# Altium PCB TrebleBoost.PcbDoc
Units mil, origin at the board's own origin, x right, y up, seen from the top; angles counter-clockwise.
Board outline 2400 x 1800 mil, 2 copper layers (Top Layer, Bottom Layer); 45 components, 38 nets, 161 pads, 0 vias.
Unrouted connection lines stored in the file: 58.
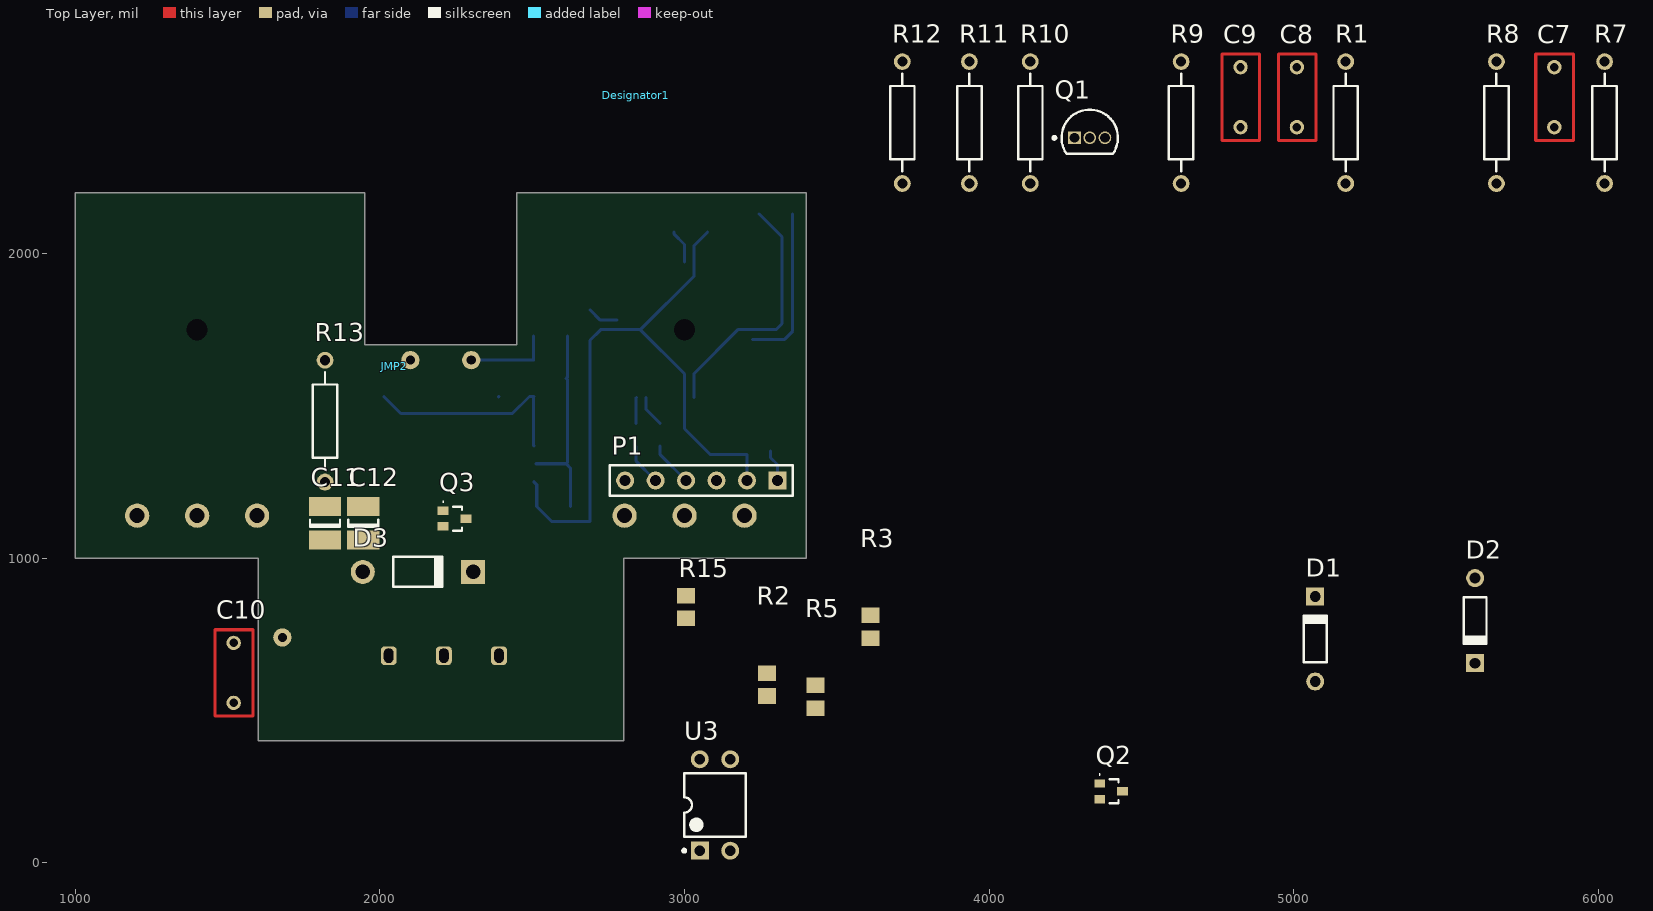
[diagram p0: Top Layer view]
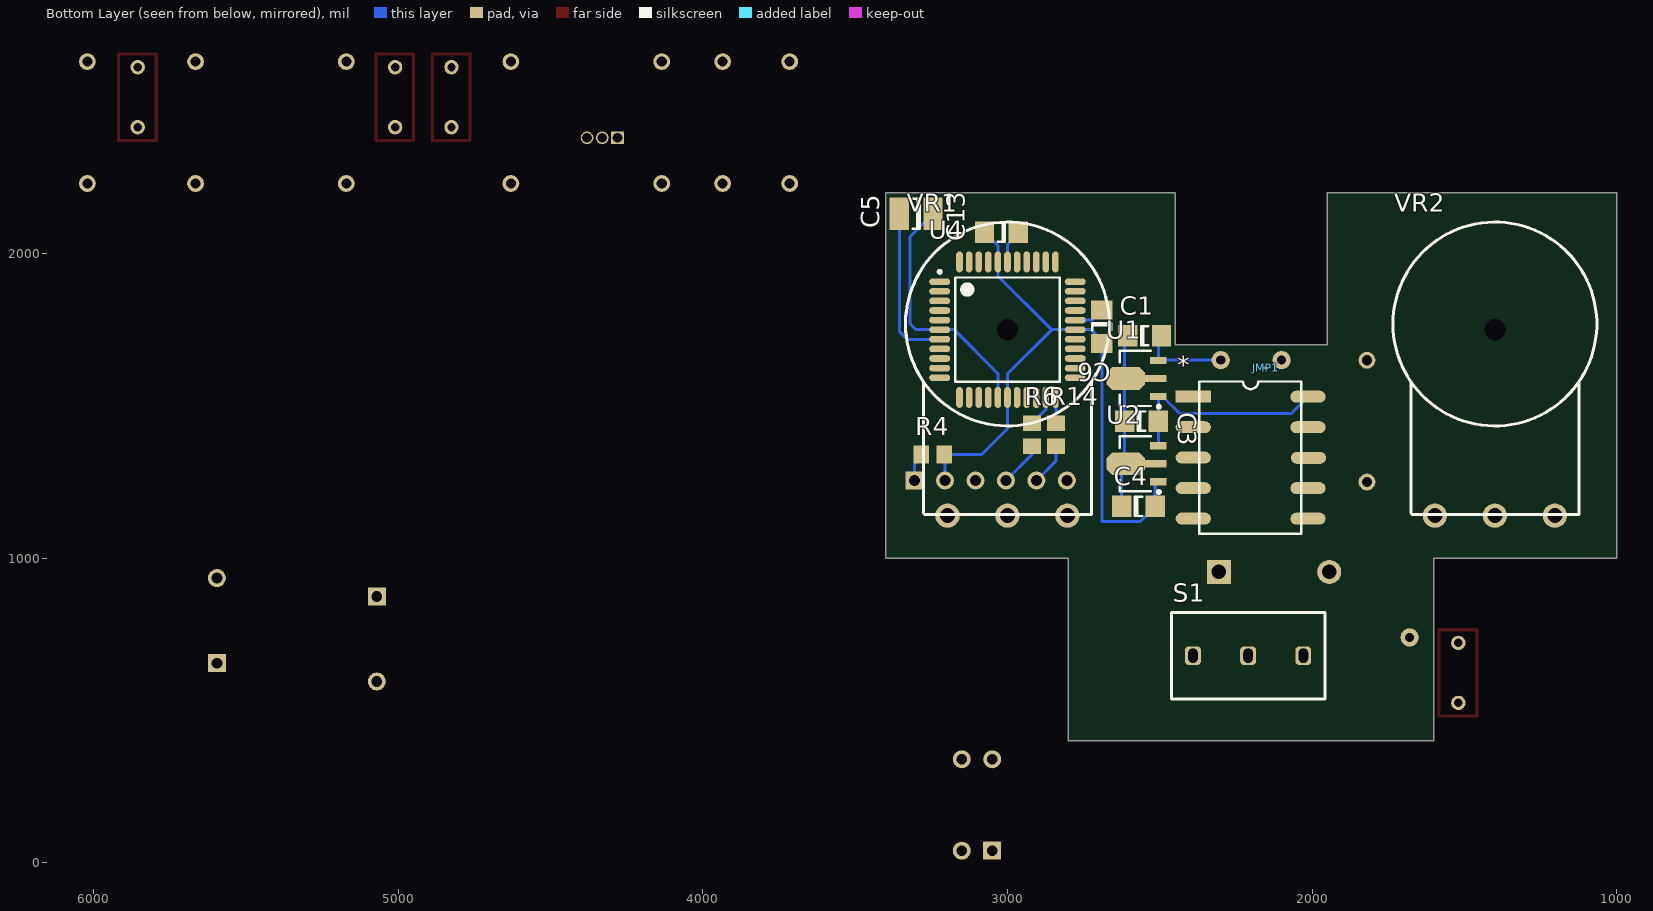
[diagram p1: Bottom Layer view, seen from below]

## Layer stack, top to bottom
Top Solder: solder mask 0.4, Solder Resist, Dk 3.5
Top Layer: signal copper 1.4
Dielectric 1: dielectric 12.6, FR-4, Dk 4.8
Bottom Layer: signal copper 1.4
Bottom Solder: solder mask 0.4, Solder Resist, Dk 3.5

## Board outline
1950,2200 1950,1700 2450,1700 2450,2200 3400,2200 3400,1000 2800,1000 2800,400 1600,400 1600,1000 1000,1000 1000,2200

## Design rules (kind name [scope] priority, off if disabled: settings)
Clearance [All] p1: gap=7 ignorepadtopadclearanceinfootprint=FALSE except(0: Arc-Hole Track-Hole)
ComponentClearance [All] p1: gap=5 collisioncheckmode=3 verticalgap=10 showdistances=FALSE
PolygonConnect [All] p1: connectstyle=Relief reliefconductorwidth=10 reliefentries=4 polygonreliefangle="90 Angle" airgapwidth=10
RoomDefinition U_TrebleBoost [InComponentClass('U_TrebleBoost')] p1 off: confinementstyle=ConfineIn formatcopy=TRUE lockcomponents=FALSE outline 3445,2140 6105,2140 6105,2770 3445,2770
RoomDefinition U_RelayBypass [InComponentClass('U_RelayBypass')] p2 off: confinementstyle=ConfineIn formatcopy=TRUE lockcomponents=FALSE outline 3445,1440 6820,1440 6820,2090 3445,2090
RoomDefinition U_Connectors [InComponentClass('U_Connectors')] p3 off: confinementstyle=ConfineIn formatcopy=TRUE lockcomponents=FALSE outline 3445,1060 4485,1060 4485,1350 3445,1350
RoutingVias [All] p1: holewidth=28 width=50 viastyle="Through Hole" minholewidth=28 minwidth=50 maxholewidth=28 maxwidth=50
SolderMaskExpansion [All] p1: expansion=4
Width [All] p1: maxlimit=10 minlimit=10 preferedwidth=10
29 further rules are at their usual default settings.

## Classes and differential pairs
component class U_Connectors: C1 C3 C4 C11 C12 D3 JMP1 JMP2 R13 U1 U2
component class U_RelayBypass: * C5 C6 C13 D1 D2 P1 Q2 Q3 R2 R3 R4 R5 R6 R14 R15 U3 U4
component class U_TrebleBoost: C7 C8 C9 C10 Q1 R1 R7 R8 R9 R10 R11 R12 S1 VR1 VR2

## Components (designator, comment, footprint, x,y, rotation, side; value= is the part's Value field where it differs from the comment)
* "Relay DPDT Dual Coil" "EB2 Relay" 2390,1530 r180 bottom
C1 "C1206" 1206 2550,1730 r180 bottom value=100pF
C3 "C1206" 1206 2560,1450 r180 bottom value=100pF
C4 "C1206" 1206 2570,1170 r180 bottom value=100pF
C5 "C1210" 1210 3300,2130 r0 bottom value=100pF
C6 "C1206" 1206 2690,1760 r270 bottom value=100pF
C7 "Wima Capacitor" "Cap-0.2\"" 5855,2415 r90 top value=100n
C8 "Wima Capacitor" "Cap-0.2\"" 5010,2415 r90 top value=100n
C9 "Wima Capacitor" "Cap-0.2\"" 4825,2415 r90 top value=100n
C10 "Wima Capacitor" "Cap-0.2\"" 1520,525 r90 top value=100n
C11 "C1210" 1210 1820,1115 r90 top value=100pF
C12 "C1210" 1210 1945,1115 r90 top value=100pF
C13 "C1206" 1206 3020,2070 r0 bottom value=100pF
D1 "Diode 1N4148" DO-35 5070,735 r90 top
D2 "Diode 1N4148" DO-35 5595,795 r270 top
D3 "BZX85C12" DO41 2125,955 r0 top
Designator1 "Comment" DC_Jack 2840,2520 r90 top
JMP1 "Jumper" Jumper 2150,1625 r0 bottom
JMP2 "Jumper" Jumper 2045,1630 r0 top
P1 "Header 6" HDR1X6 3305,1255 r180 top
Q1 "2N5088G" ONSC-TO-92-3-29-11 4330,2380 r0 top
Q2 "MMBT3904WT1G" ONSC-SC-70-3-419-04_V 4400,235 r0 top
Q3 "MMBT3904WT1G" ONSC-SC-70-3-419-04_V 2245,1130 r0 top
R1 "Res2" AXIAL-0.4 5170,2430 r90 top value=1K
R2 "ERJ6BQ" 6-0805 3270,585 r90 top
R3 "ERJ6BQ" 6-0805 3610,775 r90 top
R4 "ERJ6BQ" 6-0805 3245,1340 r180 bottom
R5 "ERJ6BQ" 6-0805 3430,545 r90 top
R6 "ERJ6BQ" 6-0805 2920,1405 r90 bottom
R7 "Res2" AXIAL-0.4 6020,2430 r90 top value=1K
R8 "Res2" AXIAL-0.4 5665,2430 r90 top value=1K
R9 "Res2" AXIAL-0.4 4630,2430 r90 top value=1K
R10 "Res2" AXIAL-0.4 4135,2430 r90 top value=1K
R11 "Res2" AXIAL-0.4 3935,2430 r90 top value=1K
R12 "Res2" AXIAL-0.4 3715,2430 r90 top value=1K
R13 "Res2" AXIAL-0.4 1820,1450 r270 top value=1K
R14 "ERJ6BQ" 6-0805 2840,1405 r90 bottom
R15 "ERJ6BQ" 6-0805 3005,840 r270 top
S1 "SPDT Toggle" "SPDT Toggle" 2028.9,680 r0 bottom
U1 "L78L05ABUTR" SOT-89_N 2580,1590 r0 bottom
U2 "L78L33ABUTR" SOT-89_N 2580,1310 r0 bottom
U3 "Optoisolator1" DIP-4 3100,190 r90 top
U4 "PIC24FJ64GA004-E/PT" TQFP-PT44_N 3000,1750 r180 bottom
VR1 "Pot-16mm" Pot-16mm 3000,1139.76 r180 bottom value=A10k
VR2 "Pot-16mm" Pot-16mm 1400,1139.76 r180 bottom value=A10k

## Footprints (in the part's own frame and the unit in brackets; to place one, negate y for a bottom-side part, rotate by r counter-clockwise, add the part's x,y. Pads: shape width x height; smd on the part's side, far side on the other; paste and mask are expansions set on the pad)
6-0805 [mm] "Chip Resistor; Body 2 x 1.2 mm (LxW typ)"
  rect 1.3x1.5 smd: 1(-0.95,0) 2(0.95,0)
1206 [mm] "Chip Capacitor; Body 3.2 x 1.6 mm (LxW typ)"
  rect 1.6x1.8 smd: 1(-1.4,0) 2(1.4,0)
  silkscreen extent -0.3,-0.8 0.3,0.8
1210 [mm] "Chip Capacitor; Body 3.2 x 2.5 mm (LxW typ)"
  rect 1.6x2.7 smd: 1(-1.4,0) 2(1.4,0)
  silkscreen extent -0.3,-1.25 0.3,1.25
AXIAL-0.4 [mm] "Axial Device, Thru-Hole; 2 Leads; 0.4 in Pin Spacing"
  round 1.4 hole 0.85: 1(-5.08,0) 2(5.08,0)
  silkscreen extent -4.06,-1.02 4.06,1.02
"Cap-0.2\"" [mm]
  round 1.2 hole 0.7: 1(0,0) 2(5,0)
  Top Layer lines w0.254: -1.102,-1.6 6.1,-1.6 6.1,1.55 -1.1,1.55 -1.1,-1.6
  body extent -1.1,-1.6 6.1,1.5, height 6.5
DC_Jack [mil]
  body extent -274,309 266,849, height 720
DIP-4 [mm] "DIP; 4 Leads; Row Spacing 7.62 mm; Pitch 2.54 mm"
  rect 1.5x1.5 hole 0.9: 1(-3.81,1.27)
  round 1.5 hole 0.9: 2(-3.81,-1.27) 3(3.81,-1.27) 4(3.81,1.27)
  silkscreen extent -3.93,-2.55 2.65,2.69, body extent -3.15,-2.5 3.15,2.5, height 5.6
DO41 [mm] "Diode, Axial; Body 4.1 x 2.5 mm (LxDia. max), Lead Dia. 0.85 mm (max)"
  round 2 hole 1.2: 1(-4.6,0)
  rect 2x2 hole 1.2: 2(4.6,0)
  silkscreen extent -2.05,-1.25 2.15,1.25
DO-35 [mm] "Diode, Axial; Body 3.8 x 1.9 mm (LxDia. max), Lead Dia. 0.53 mm (max)"
  round 1.5 hole 0.9: 1(-3.55,0)
  rect 1.5x1.5 hole 0.9: 2(3.55,0)
  silkscreen extent -1.95,-0.95 2.05,0.95
"EB2 Relay" [mm]
  rect 2.94x1 smd: 1(0,0)
  oval 2.94x1 smd: 2(0,-2.54) 3(0,-5.08) 4(0,-7.62) 5(0,-10.16) 6(9.56,-10.16) 7(9.56,-7.62) 8(9.6,-5.1) 9(9.56,-2.54) 10(9.56,0)
  silkscreen extent 0.5,-11.43 9,1.27, body extent 0.5,-11.4 9,1.2, height 7.5
HDR1X6 [mm] "Connector; Header; 6 Position"
  rect 1.5x1.5 hole 0.9: 1(0,0)
  round 1.5 hole 0.9: 2(2.54,0) 3(5.08,0) 4(7.62,0) 5(10.16,0) 6(12.7,0)
  silkscreen extent -1.27,-1.27 13.97,1.27
Jumper [mil]
  round 10 smd paste+0: 1(0,0)
  round 10 smd: 2(5,0)
ONSC-SC-70-3-419-04_V [mm] "SOT23, 3-Leads, Body 2x1.25mm, Pitch 0.65mm"
  rect 0.9x0.7 smd: 1(-0.95,0.65) 2(-0.95,-0.65) 3(0.95,0)
  silkscreen extent -1,-1 0.63,1.45, body extent -0.63,-1 0.63,1, height 1
ONSC-TO-92-3-29-11 [mm] "TO, 3-Leads, Body Dia 4.7mm, Pitch 1.27mm"
  rect 1.05x1.05 hole 0.8: 1(-1.27,0)
  round 1.05 hole 0.8: 2(0,0) 3(1.27,0)
  silkscreen extent -3.07,-1.34 2.35,2.35, body extent -2.35,-1.33 2.36,2.36, height 7.87
Pot-16mm [mil]
  round 80 hole 50: 1(196.85,0) 2(0,0) 2(0,0) 3(-196.85,0)
  round 0 hole 70: 6(0,610.24)
  silkscreen extent -335,4 334,964, body extent -335,-4 335,945, height 900
SOT-89_N [mm] "SOT89, 3-Leads, Body 4.5x2.4 mm, Pitch 1.5mm, Lead Span 4.1mm, IPC Medium Density"
  rect 1.4x0.6 smd: 1(-1.9,1.5) 3(-1.9,-1.5)
  rect 1.8x0.6 smd: 2(-1.7,0)
  oct 3.2x1.9 smd: 2(0.8,0)
  silkscreen extent -2.07,-2.3 1.3,2.47, body extent -1.3,-2.3 1.3,2.3, height 1.6
"SPDT Toggle" [mil]
  rrect50% 52x62 hole 31.5 slot 47.24 at 90 deg: 2(0,0) 2(181.1,0) 2(362.2,0)
  silkscreen extent -71,-142 433,142, body extent -73,-138 427,146, height 992
TQFP-PT44_N [mm] "Thin QFP, 44-Leads, Body 10x10mm, Pitch 0.8mm, IPC Medium Density"
  oval 1.75x0.55 smd: 1(-5.65,4) 2(-5.65,3.2) 3(-5.65,2.4) 4(-5.65,1.6) 5(-5.65,0.8) 6(-5.65,0) 7(-5.65,-0.8) 8(-5.65,-1.6) 9(-5.65,-2.4) 10(-5.65,-3.2) 11(-5.65,-4) 23(5.65,-4) 24(5.65,-3.2) 25(5.65,-2.4) 26(5.65,-1.6) 27(5.65,-0.8) 28(5.65,0) 29(5.65,0.8) 30(5.65,1.6) 31(5.65,2.4) 32(5.65,3.2) 33(5.65,4)
  oval 0.55x1.75 smd: 12(-4,-5.65) 13(-3.2,-5.65) 14(-2.4,-5.65) 15(-1.6,-5.65) 16(-0.8,-5.65) 17(0,-5.65) 18(0.8,-5.65) 19(1.6,-5.65) 20(2.4,-5.65) 21(3.2,-5.65) 22(4,-5.65) 34(4,5.65) 35(3.2,5.65) 36(2.4,5.65) 37(1.6,5.65) 38(0.8,5.65) 39(0,5.65) 40(-0.8,5.65) 41(-1.6,5.65) 42(-2.4,5.65) 43(-3.2,5.65) 44(-4,5.65)
  silkscreen extent -5.77,-4.35 4.35,4.95, body extent -5,-5 5,5, height 1.2

## Part data
C1 C3 C4 C5 C6 C11 C12 C13: "Ceramic Chip Capacitor - Standard", PackageDocument=Mar-2001, ComponentLink1Description="Manufacturer Link", ComponentLink1URL=http://www.kemet.com/, ComponentLink2Description=Datasheet, ComponentLink2URL=http://www.kemet.com/kemet/web/homepage/kechome.nsf/vapubfilesname/F3102TA.pdf/$file/F3102TA.pdf, DatasheetDocument=Mar-2001, LatestRevisionDate=19-Mar-2004, LatestRevisionNote="Silkscreen size reduced.", Published=17-Jul-2002, Publisher="Altium Limited"
  C1 C3 C4 C6 C13: Code_IPC="3216 [1206]", Code_JEITA=1206, PackageReference=1206
  C5 C11 C12: Code_IPC="3225 [1210]", Code_JEITA=1210, PackageReference=1210
D1 D2: "High Conductance Fast Diode", Code_JEDEC=DO-204-AH, ComponentLink1Description="Manufacturer Link", ComponentLink1URL=http://www.fairchildsemi.com/, ComponentLink2Description=Datasheet, ComponentLink2URL=http://www.fairchildsemi.com/ds/1N%2F1N4148.pdf, DatasheetVersion=1997, LatestRevisionDate=17-Jul-2002, LatestRevisionNote="Re-released for DXP Platform.", PackageDescription="Diode, Axial; Body 3.8 x 1.9 mm (LxDia. max), Lead Dia. 0.53 mm (max)", PackageReference=DO-35, Published=8-Jun-2000, Publisher="Altium Limited"
D3: "Silicon Epitaxial Planar Zener Diode (1W)", Code_JEDEC=DO-204-AM, ComponentLink1Description="Manufacturer Link", ComponentLink1URL=http://www.vishay.com/, ComponentLink2Description=Datasheet, ComponentLink2URL=http://www.vishay.com/docs/85607/85607.pdf, DatasheetDocument=1-Apr-1999, LatestRevisionDate=17-Jul-2002, LatestRevisionNote="Re-released for DXP Platform.", PackageReference=DO41, Published=8-Jun-2000, Publisher="Altium Limited"
P1: "Header, 6-Pin", LatestRevisionDate=17-Jul-2002, LatestRevisionNote="Re-released for DXP Platform.", Publisher="Altium Limited"
Q1: "Amplifier Transistor, NPN Silicon, 3-Pin TO-92, Pb-Free, Bulk Box", Manufacturer="On Semiconductor", Supplier Part Number 1=42K3133, ComponentLink1Description="Manufacturer URL", ComponentLink1URL=http://www.onsemi.com/, ComponentLink2Description=Datasheet, ComponentLink2URL=http://www.onsemi.com/pub_link/Collateral/2N5088-D.PDF, ComponentLink3Description="Package Specification", ComponentLink3URL=http://www.onsemi.cn/pub_link/Collateral/2N6426-D.PDF, DatasheetVersion="Rev. 4", fT Min (MHz)=50, IC Continuous (A)=0.05, Mounting Technology="Through Hole", PackageDescription="3-Pin Transistor Outline, Body 4.825 x 3.685 mm, Pitch 1.27 mm", PackageReference=TO-92-3-29-11_AM_SL, PackageVersion="Rev. AM", Packing="Bulk Box", PartNumber=2N5088G, Polarity=NPN, RoHS=TRUE, Supplier 1=Newark, Supplier 2=Mouser, Supplier Part Number 2=863-2N5088G
Q2 Q3: "General Purpose Transistor, NPN Silicon, 3-Pin SC70, Pb-Free, Tape and Reel", Manufacturer="On Semiconductor", Supplier Part Number 1=MMBT3904WT1GOSTR-ND, ComponentLink1Description="Manufacturer URL", ComponentLink1URL=http://www.onsemi.com/, ComponentLink2Description=Datasheet, ComponentLink2URL=http://www.onsemi.cn/pub_link/Collateral/MMBT3904WT1-D.PDF, ComponentLink3Description="Package Specification", ComponentLink3URL=http://www.onsemi.cn/pub_link/Collateral/419-04.PDF, DatasheetVersion="Rev. 8", fT Min (MHz)=300, IC Continuous (A)=0.2, Mounting Technology="Surface Mount", PackageDescription="3-Pin Small Outline Transistor, Body 2 x 1.25 mm, Pitch 0.65 mm", PackageReference=SC-70-3-419-04, PackageVersion="Rev. N, 11/2008", Packing="Tape and Reel", PartNumber=MMBT3904WT1G, Polarity=NPN, RoHS=TRUE, Supplier 1=Digi-Key, Supplier 2=Digi-Key, Supplier 3=Digi-Key, Supplier 4=Farnell, Supplier 5=Farnell, Supplier 6=Farnell, Supplier 7=Newark, Supplier 8=Newark, Supplier 9=Mouser, Supplier Part Number 2=MMBT3904WT1GOSCT-ND, Supplier Part Number 3=MMBT3904WT1GOSDKR-ND, Supplier Part Number 4=1459102, Supplier Part Number 5=2317829, Supplier Part Number 6=1459102RL, Supplier Part Number 7=67R1339, Supplier Part Number 8=88H4788, Supplier Part Number 9=863-MMBT3904WT1G
R1 R7 R8 R9 R10 R11 R12 R13: "Resistor", LatestRevisionDate=17-Jul-2002, LatestRevisionNote="Re-released for DXP Platform.", PackageDescription="Axial Device, Thru-Hole; 2 Leads; 0.4 in Pin Spacing", PackageReference=AXIAL-0.4, Published=8-Jun-2000, Publisher="Altium Limited"
R2 R3 R4 R5 R6 R14 R15: "Low Ohmic Value Thick Film Chip Resistor, 0.22 Ohm to 9.1 Ohm Range, 1%, 2% and 5% Tolerance, 0805 Size, 0.25 W", PackageDocument=Mar-2003, Code_IPC="2012 [0805]", ComponentLink1Description="Manufacturer Link", ComponentLink1URL=http://www.panasonic.com/industrial/components/resistive_products.htm, ComponentLink2Description=Datasheet, ComponentLink2URL=http://www.panasonic.com/industrial/components/pdf/AOA0000CE3.pdf, LatestRevisionDate=19-Mar-2004, LatestRevisionNote="Silkscreen size reduced.", PackageReference=6-0805, Published=17-Dec-2003, Publisher="Altium Limited"
U1: "Positive Voltage Regulator, 5V, 4-Pin SOT-89, Tape and Reel", ComponentLink1Description="Manufacturer URL", ComponentLink1URL=http://www.st.com, ComponentLink2Description=Datasheet, ComponentLink2URL=http://www.st.com/internet/com/TECHNICAL_RESOURCES/TECHNICAL_LITERATURE/DATASHEET/CD00000446.pdf, DatasheetVersion=Feb-2011, PackageDescription="3-Pin SOT-89 Package 1.5 mm Pitch, 4.1 mm Lead Span", PackageReference=SOT-89, PackageVersion=2011, PartNumber=L78L05ABUTR
U2: "Positive Voltage Regulator, 3.3V, 4-Pin SOT-89, Tape and Reel", ComponentLink1Description="Manufacturer URL", ComponentLink1URL=http://www.st.com, ComponentLink2Description=Datasheet, ComponentLink2URL=http://www.st.com/internet/com/TECHNICAL_RESOURCES/TECHNICAL_LITERATURE/DATASHEET/CD00000446.pdf, DatasheetVersion=Feb-2011, PackageDescription="3-Pin SOT-89 Package 1.5 mm Pitch, 4.1 mm Lead Span", PackageReference=SOT-89, PackageVersion=2011, PartNumber=L78L33ABUTR
U3: "4-Pin Phototransistor Optocoupler", DatasheetVersion=Nov-2003, LatestRevisionDate=04-Mar-2005, LatestRevisionNote="Sch pins 3 & 4 Swapped.", PackageReference=DIP-4, Published=24-Mar-1999, Publisher="Altium Limited"
U4: "General Purpose 16-Bit Flash Microcontroller, 64KB Flash, 8KB SRAM, 44-Pin TQFP, Extended Temperature", Supplier Part Number 1=PIC24FJ64GA004-E/PT-ND, Code_JEDEC=MS-026, ComponentLink1Description=Datasheet, ComponentLink1URL=http://ww1.microchip.com/downloads/en/DeviceDoc/39881D.pdf, ComponentLink2Description="Packaging Specification", ComponentLink2URL=http://www.microchip.com/stellent/groups/techpub_sg/documents/packagingspec/en012702.pdf, ComponentLink3Description="Microchip.com Home", ComponentLink3URL=http://www.microchip.com/, DatasheetVersion="revD, Feb-2010", LatestRevisionDate=07-Oct-2010, LatestRevisionNote="Updated to datasheet revision D, Feb-2010. Supplier links updated.", PackageDescription="44-Lead Plastic Thin Quad Flatpack (PT) - 10x10x1mm Body, 2.00mm [TQFP]", PackageReference=TQFP-PT44, PackageVersion="revBB, Aug-2009", Published=2-Dec-2009, Publisher="Altium Limited", Supplier 1=Digi-Key, Supplier 2=Farnell, Supplier Part Number 2=1788574

## Free pads (board coordinates)
  round 60 hole 30: 7(1680,740) 8(2300,1650) 9(2100,1650)

## Nets (pads, with @x,y where several pads share a name; then routed paths per layer and width w, separated by ;. In a path a pad name is that pad's centre, name@x,y a point inside that pad or via, vN(x,y) a via of type N, cw(c..) or ccw(c..) an arc to the next point about the centre after c; other vN are vias at no path point)
3.3V: C4.2 C6.2 C13.2 P1.2 R4.2 U2.1 U4.17 U4.28 U4.40 | length 2176.7
  Bottom Layer w10: U2.1 2514.88,1241.26 C4.2 2564.88,1120 2690,1120 C6.2 2690,1715 2725,1750 U4.28 2855,1750 ; C13.2 3031.5,2026.38 U4.40 3031.5,1926.5 2855,1750 ; P1.2 3205,1340 3085,1340 3000,1425 U4.17 3000,1605 2855,1750
5v: *.1 *.10 C3.2 D1.2 D2.2 U1.1 U2.3 | length 700.2
  Bottom Layer w10: *.10 2068.62,1475 2435,1475 2490.94,1530.94 U1.1 ; *.1 *.1@2390.94,1530.94 ; U1.1@2504.25,1530 2504.88,1529.37 C3.2 2504.88,1369.37 U2.3
9V: C11.2 C12.2 D3.2 R1.2 R8.2 R13.2
9Vin: C1.2 pad.8 R13.1 U1.3 | length 285.8
  Bottom Layer w10: pad.8@2300.94,1649.06 pad.8 2504.25,1650 2504.88,1650.63 C1.2@2504.88,1730
AGND: C10.1 C11.1 C12.1 D3.1 JMP2.2 R10.1 R11.1 R12.1 VR1.1
DGND: C1.1 C3.1 C4.1 C5.1 JMP1.2 P1.3 Q2.2 Q3.2 U1.2 U2.2 U3.2 U3.3 U4.6 U4.16 | length 1494.8
  Bottom Layer w10: U2.2@2513.07,1310 U2.2@2611.5,1310 ; C1.1@2615.12,1730 2615.12,1593.62 2611.5,1590 2615.12,1586.38 C3.1 2615.12,1313.62 U2.2@2611.5,1310 ; C4.1 2625.12,1296.38 U2.2@2611.5,1310 ; U4.16 3031.5,1606.5 3175,1750 U4.6 3300,1750 3320,1770 3320,2054.88 C5.1
GND_in: JMP1.1 JMP2.1 pad.9
Input: *.3
LED+: R15.2
MCLR': P1.1 R4.1 U4.18 | length 107
  Bottom Layer w10: R4.1@3282.4,1352.6 R4.1 3282.4,1330 3305,1307.4 P1.1
Net*_2: *.2 *.9
Net*_4: *.4 C9.2 R11.2
Net*_5: *.5 D1.1 Q3.3
Net*_6: *.6 D2.1 Q2.3
Net*_7: *.7 VR1.2
NetC6_1: C6.1 U4.29 | length 101.5
  Bottom Layer w10: C6.1 2723.62,1781.5 U4.29
NetC7_1: C7.1 R7.1
NetC7_2: C7.2
NetC8_1: C8.1 VR1.3
NetC9_1: C9.1 R9.2
NetC10_2: C10.2 VR2.2
NetC13_1: C13.1 U4.39 | length 112.1
  Bottom Layer w10: C13.1 2964.88,2065.12 3000,2030 U4.39
NetQ1_1: Q1.1 R12.2 VR2.3
NetQ1_2: Q1.2 R1.1 R9.1 R10.2 S1.2
NetQ1_3: Q1.3 R7.2 R8.1
NetQ2_1: Q2.1 R3.1
NetQ3_1: Q3.1 R5.1
NetR2_1: R2.1 U3.1
NetR3_2: R3.2 U4.19
NetR5_2: R5.2 U4.20
NetR6_2: R6.2 U4.21 | length 104.2
  Bottom Layer w10: U4.21 2874.02,1488.39 R6.2
NetR14_2: R14.2 U4.22 | length 86.2
  Bottom Layer w10: R14.2 2840,1525.04 U4.22
NetR15_1: R15.1 U4.25
Opto: R2.2 U4.26
Output: *.8 U3.4
PGC: P1.5 R14.1 | length 139.5
  Bottom Layer w10: R14.1 2840,1320 P1.5
PGD: P1.4 R6.1 | length 147.8
  Bottom Layer w10: R6.1 2920,1340 P1.4
Vcap: C5.2 U4.7 | length 528.6
  Bottom Layer w10: U4.7 3328.5,1718.5 3355.12,1745.12 C5.2
pads on no net: C8.2 P1.6 U4.1 U4.2 U4.3 U4.4 U4.5 U4.8 U4.9 U4.10 U4.11 U4.12 U4.13 U4.14 U4.15 U4.23 U4.24 U4.27 U4.30 U4.31 U4.32 U4.33 U4.34 U4.35 U4.36 U4.37 U4.38 U4.41 U4.42 U4.43 U4.44 VR1.6 VR2.1 VR2.6